# Altium PCB PCB.PcbDoc
Units mm, origin at the board's own origin, x right, y up, seen from the top; angles counter-clockwise.
Board outline 87.25 x 45.97 mm, 2 copper layers (Top Layer, Bottom Layer); 34 components, 25 nets, 122 pads, 2 vias.
Unrouted connection lines stored in the file: 1.
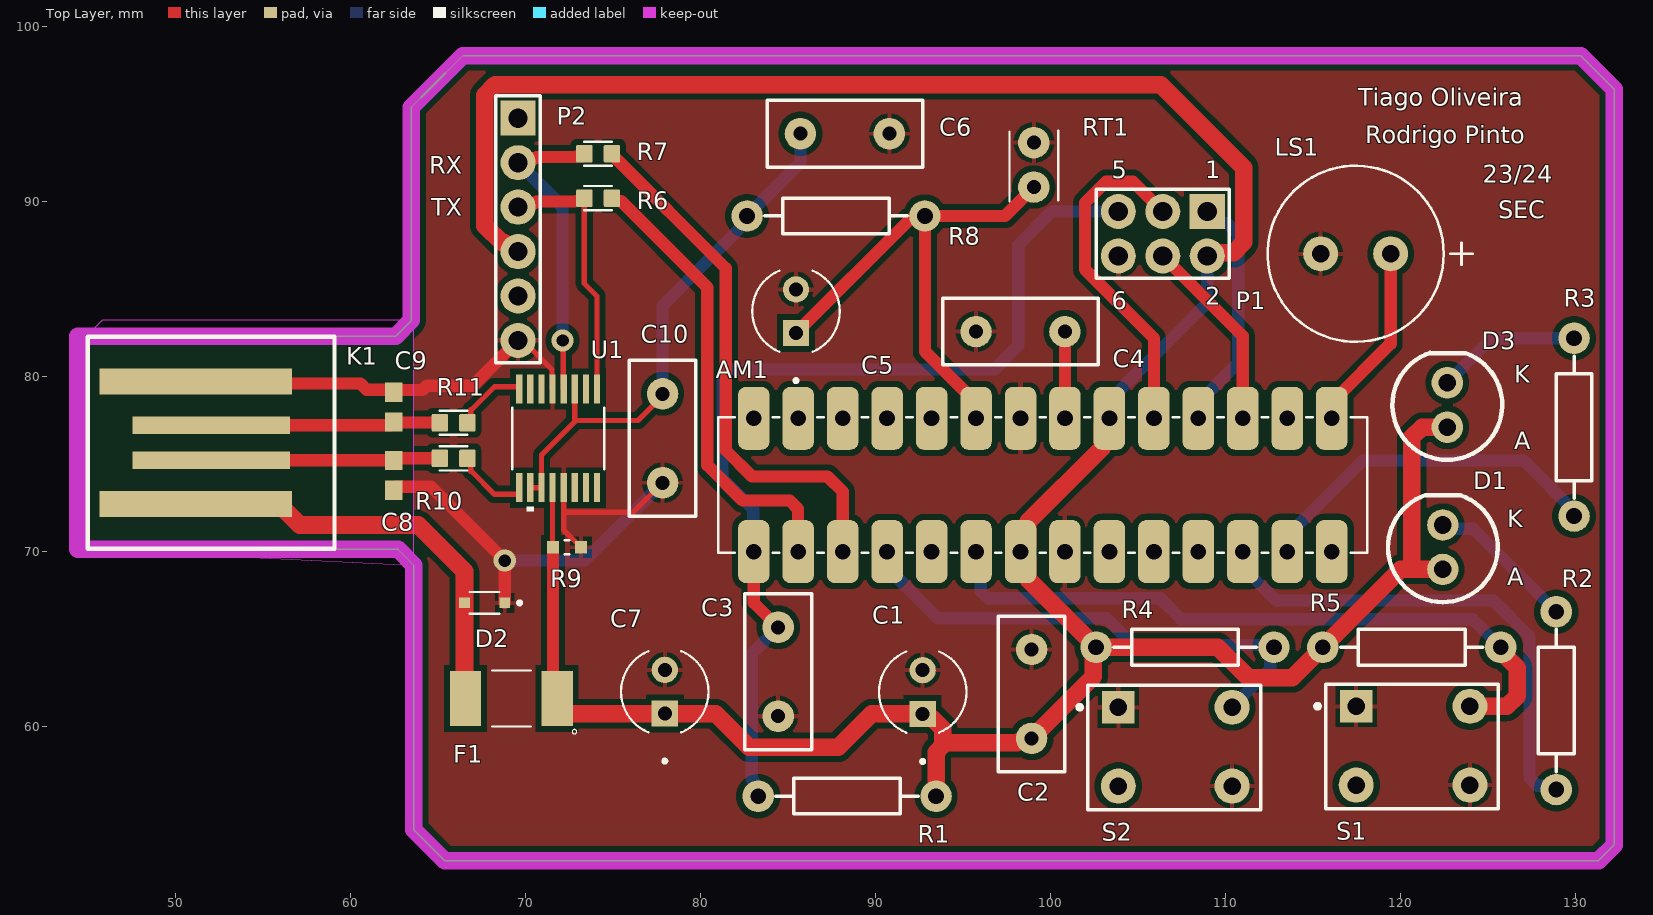
[diagram p0: Top Layer view]
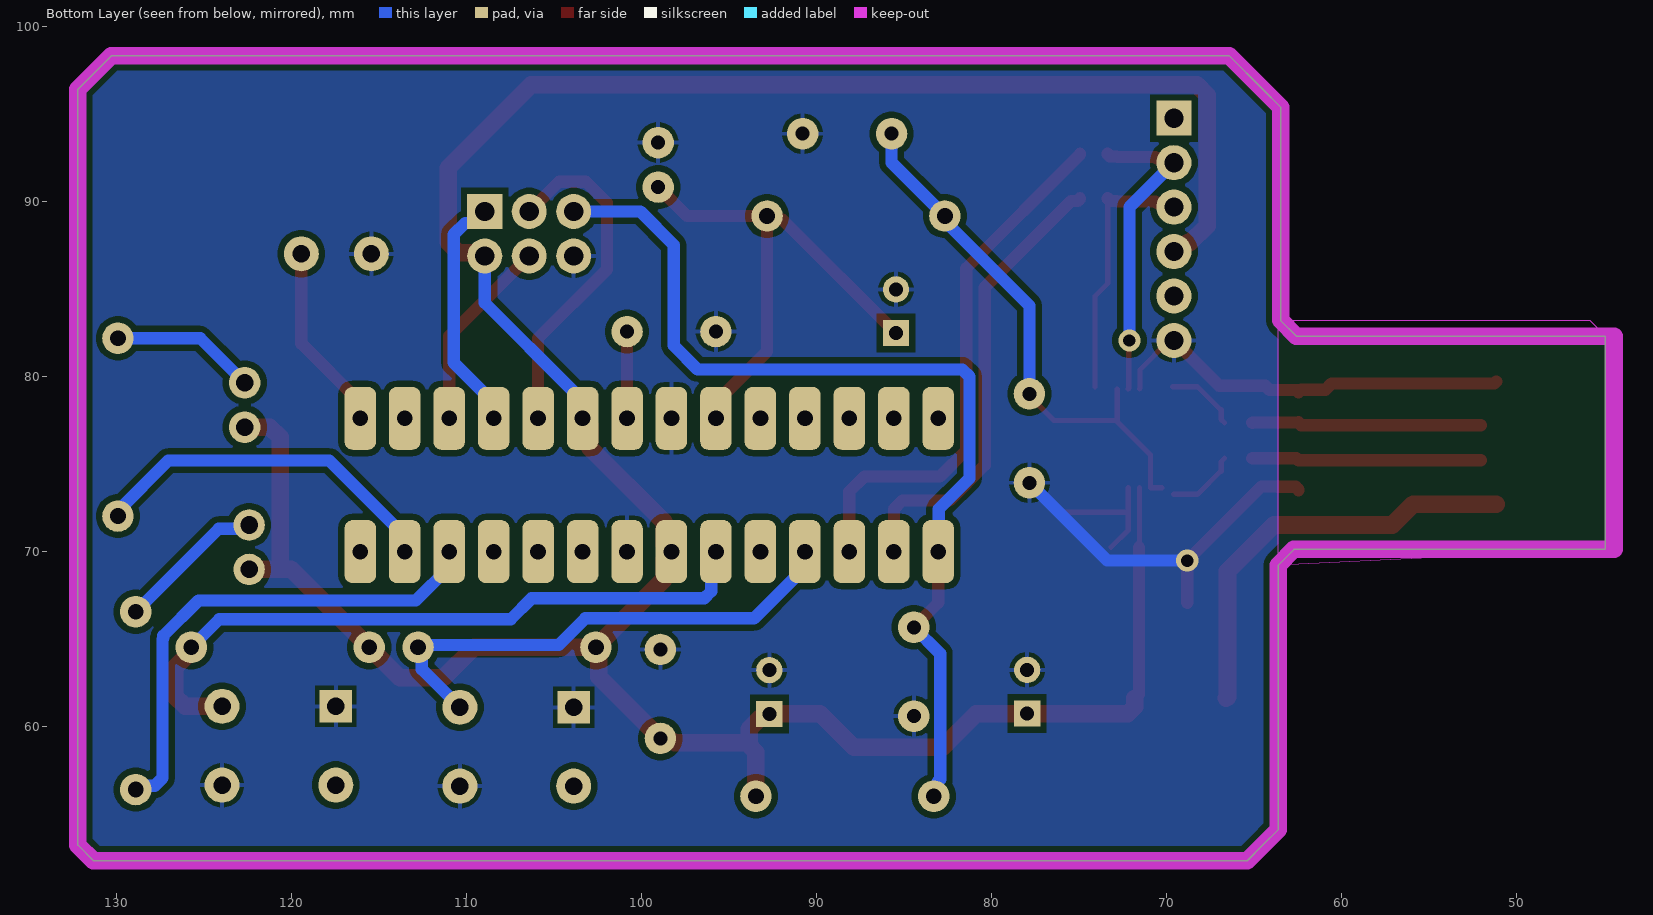
[diagram p1: Bottom Layer view, seen from below]
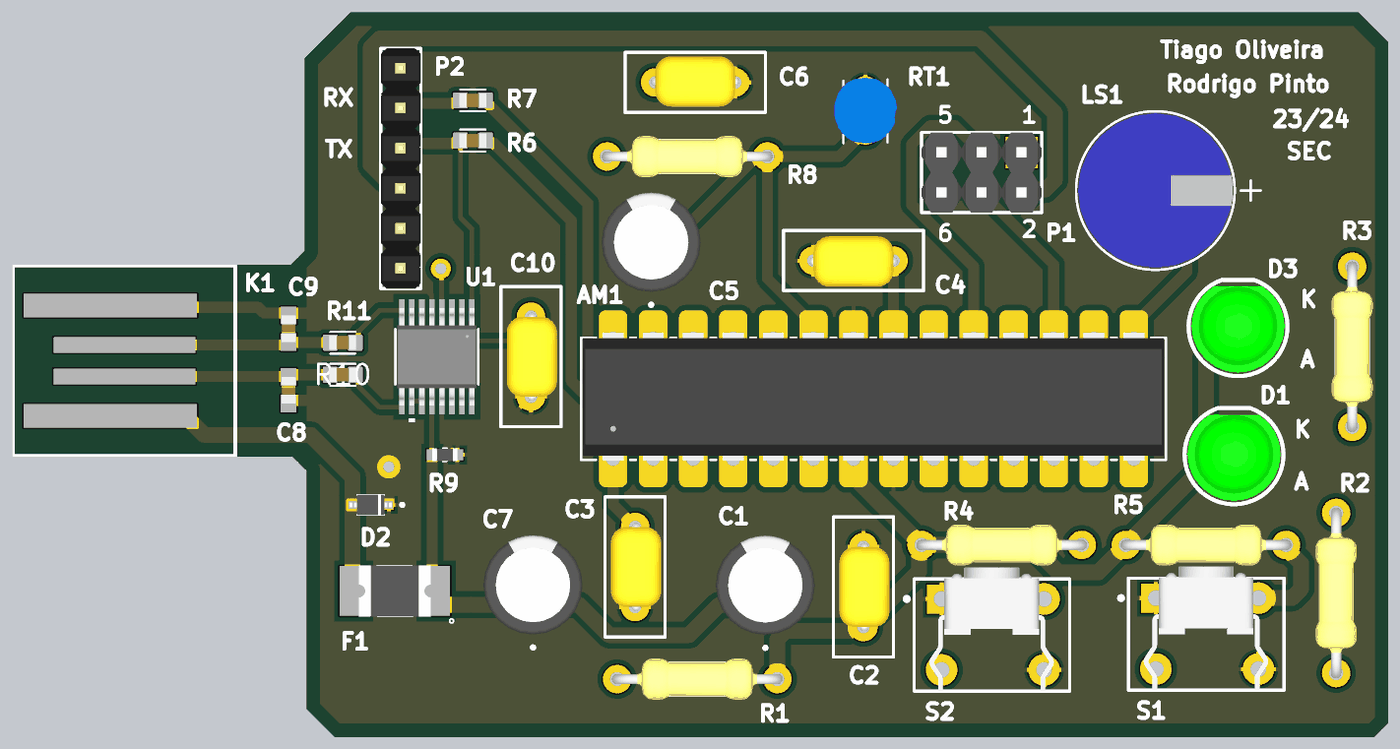
[diagram p2: 3D render of the assembled board from above, using the file's embedded part models]

## Layer stack, top to bottom
Top Solder: solder mask 0.0102, Solder Resist, Dk 3.5
Top Layer: signal copper 0.0356
Dielectric 1: dielectric 0.32, FR-4, Dk 4.8
Bottom Layer: signal copper 0.0356
Bottom Solder: solder mask 0.0102, Solder Resist, Dk 3.5

## Board outline
44.958,70.104 62.738,70.104 63.627,69.215 63.627,54.102 64.516,53.213 65.405,52.324 131.318,52.324 132.207,53.213 132.207,96.393 130.302,98.298 66.421,98.298 64.516,96.393 63.5,95.377 63.5,83.185 62.611,82.296 44.958,82.296

## Design rules (kind name [scope] priority, off if disabled: settings)
Clearance [All] p1: gap=0.254 ignorepadtopadclearanceinfootprint=TRUE
PolygonConnect [All] p1: thpad.connectstyle=Relief thpad.reliefconductorwidth=0.254 thpad.reliefentries=4 thpad.polygonreliefangle="90 Angle" thpad.airgapwidth=0.254 smdpad.connectstyle=Relief smdpad.reliefconductorwidth=0.254 smdpad.reliefentries=4 smdpad.polygonreliefangle="90 Angle" smdpad.airgapwidth=0.254 via.connectstyle=Direct via.reliefconductorwidth=0.254 via.reliefentries=4 via.polygonreliefangle="90 Angle" via.airgapwidth=0.254
RoutingVias [All] p1: holewidth=0.711 width=1.27 viastyle="Through Hole" minholewidth=0.711 minwidth=1.27 maxholewidth=0.711 maxwidth=1.27
SMDNeckDown [All] p1: percent=50.000
SilkToSolderMaskClearance [IsText] p1: minsilkscreentomaskgap=0.254 clearancetoexposedcopper=TRUE
SolderMaskExpansion [All] p1: expansion=0.102 istentingtop=FALSE
Width [All] p1: maxlimit=1 minlimit=0.254 preferedwidth=0.7 minimp=50.000000 maximp=50.000000 favimp=50.000000
29 further rules are at their usual default settings.

## Classes and differential pairs
component class U_USB: C8 C9 C10 R10 R11 U1
component class U_POWER: C7 D2 F1 R9
component class U_MicroControlador: AM1 C1 C2 C4 P1 R1
component class Main: C5 C6 D1 D3 K1 LS1 P2 R2 R3 R4 R5 R6 R7 R8 RT1 S1 S2

## Components (designator, comment, footprint, x,y, rotation, side; value= is the part's Value field where it differs from the comment)
AM1 "ATMega328P" ATMega328P 83.058,69.977 r90 top
C1 "CAP POL" "CONDENS 10uF" 92.71,61.956 r90 top value=10µF
C2 "CAP NON POL" "Capacitor 100nF" 98.933,61.849 r90 top value=100nF
C3 "CAP NON POL" "Capacitor 100nF" 84.455,63.119 r90 top value=100nF
C4 "CAP NON POL" "Capacitor 100nF" 98.298,82.55 r0 top value=100nF
C5 "CAP POL" "CONDENS 10uF" 85.471,83.713 r90 top value=10µF
C6 "CAP NON POL" "Capacitor 100nF" 88.265,93.853 r180 top value=100nF
C7 "CAP POL" "CONDENS 10uF" 77.978,61.976 r90 top value=10µF
C8 "CAP SMD" "CAP SMD" 62.484,74.334 r270 top value=47pF
C9 "CAP SMD" "CAP SMD" 62.484,78.232 r90 top value=47pF
C10 "CAP NON POL" "Capacitor 100nF" 77.851,76.454 r90 top value=100nF
D1 "LED RED" "LED 5mm" 122.428,70.231 r180 top
D2 "DIODO TVS" "DIODO TVS" 67.684,67.056 r180 top
D3 "LED YELLOW" "LED 5mm" 122.682,78.359 r180 top
F1 "FUSIVEL" "FUSIVEL ARMADO 0.5A" 69.215,61.595 r180 top
K1 "USB-A" USB 48.006,76.2 r90 top
LS1 "BUZ" BUZZ 119.443,86.995 r180 top
P1 "Header 3X2" "Connector Header 3x2" 108.966,89.408 r180 top
P2 "POLOLU AVR PROG" "Connector Header 1x6" 69.596,94.742 r270 top
R1 "RES THT" RESISTENCIA 88.392,56.007 r0 top value=10K
R2 "RES THT" RESISTENCIA 128.905,61.468 r90 top value=150R
R3 "RES THT" RESISTENCIA 129.921,77.089 r90 top value=150R
R4 "RES THT" RESISTENCIA 107.696,64.516 r0 top value=10K
R5 "RES THT" RESISTENCIA 120.65,64.516 r0 top value=10K
R6 "RES SMD" "RES SMDD" 74.168,90.17 r0 top value=120R
R7 "RES SMD" "RES SMDD" 74.168,92.71 r0 top value=120R
R8 "RES THT" RESISTENCIA 87.757,89.154 r180 top value=5K76
R9 "VARISTOR" VARISTOR 72.39,70.231 r0 top
R10 "RES SMD" "RES SMDD" 65.913,75.311 r0 top value=27R
R11 "RES SMD" "RES SMDD" 65.913,77.343 r0 top value=27R
RT1 "NTC" NTC 99.06,92.075 r90 top
S1 "SWITCH" "Switch Tactile" 117.475,61.142 r0 top
S2 "SWITCH" "Switch Tactile" 103.886,61.087 r0 top
U1 "USB CONVERTER" "CONVERSOR USB PARA UART" 71.882,76.454 r270 top

## Footprints (in the part's own frame and the unit in brackets; to place one, negate y for a bottom-side part, rotate by r counter-clockwise, add the part's x,y. Pads: shape width x height; smd on the part's side, far side on the other; paste and mask are expansions set on the pad)
ATMega328P [mm]
  rrect50% 3.6x1.8 hole 0.9 paste-0.762 mask+0: 1(0,0) 2(0,-2.54) 3(0,-5.08) 4(0,-7.62) 5(0,-10.16) 6(0,-12.7) 7(0,-15.24) 8(0,-17.78) 9(0,-20.32) 10(0,-22.86) 11(0,-25.4) 12(0,-27.94) 13(0,-30.48) 14(0,-33.02) 15(7.62,-33.02) 16(7.62,-30.48) 17(7.62,-27.94) 18(7.62,-25.4) 19(7.62,-22.86) 20(7.62,-20.32) 21(7.62,-17.78) 22(7.62,-15.24) 23(7.62,-12.7) 24(7.62,-10.16) 25(7.62,-7.62) 26(7.62,-5.08) 27(7.62,-2.54) 28(7.62,0)
  silkscreen extent -0.06,-35.05 7.68,2.03, body extent -0.13,-34.92 7.99,1.91, height 5.21
BUZZ [mm] "Magnetic Transducer Buzzer"
  round 2 hole 1 paste-0.711 mask+0: N(4,0) P(0,0)
  silkscreen extent -4.68,-5.03 7.03,5.03, body extent -2.91,-4.9 6.9,4.9, height 5.02
"CAP SMD" [mm] "Chip Capacitor, Body 1.6x0.8mm, IPC High Density"
  rect 1.1x1 smd: 1(-0.85,0) 2(0.85,0)
  body extent -0.85,-0.44 0.85,0.44, height 0.86
"Capacitor 100nF" [mm] "Radial Cap, Thru-Hole; 2 Leads; 0.2 in Pin Spacing"
  round 1.8 hole 0.8: 1(-2.54,0) 2(2.54,0)
  silkscreen extent -4.44,-1.91 4.44,1.91, body extent -2.79,-1.65 2.79,1.53, height 6.81
"CONDENS 10uF" [mm] "Polarized Capacitor; 2 Leads"
  rect 1.5x1.5 hole 0.8: 1(-1.25,0)
  round 1.5 hole 0.8: 2(1.25,0)
  silkscreen extent -4.06,-2.5 2.32,2.5, body extent -3.15,-3.15 3.15,3.15, height 11.2
"Connector Header 1x6" [mm] "Connector; Header; 6 Position"
  rect 2x2 hole 1.1: 1(0,0)
  round 2 hole 1.1: 2(2.54,0) 3(5.08,0) 4(7.62,0) 5(10.16,0) 6(12.7,0)
  silkscreen extent -1.27,-1.27 13.97,1.27, body extent -1.27,-1.27 13.97,1.27, height 9.2
"Connector Header 3x2" [mm] "Connector; Header; 3x2 Position"
  rect 2x2 hole 1.1: 1(0,0)
  round 2 hole 1.1: 2(0,2.54) 3(2.54,0) 4(2.54,2.54) 5(5.08,0) 6(5.08,2.54)
  silkscreen extent -1.27,-1.27 6.35,3.81, body extent -1.27,-1.27 6.35,3.81, height 8.38
"CONVERSOR USB PARA UART" [mil]
  rect 65.15x13.97 smd paste+0 mask+0: 1(-111.08,87.5) 2(-111.08,62.5) 3(-111.08,37.5) 4(-111.08,12.5) 5(-111.08,-12.5) 6(-111.08,-37.5) 7(-111.08,-62.5) 8(-111.08,-87.5) 9(111.08,-87.5) 10(111.08,-62.5) 11(111.08,-37.5) 12(111.08,-12.5) 13(111.08,12.5) 14(111.08,37.5) 15(111.08,62.5) 16(111.08,87.5)
  silkscreen extent -69,-104 164,104, body extent -122,-99 122,99, height 69
"DIODO TVS" [mm] "Diode, Axial; Body 5.2 x 2.7 mm (LxDia. max), Lead Dia. 0.86 mm (max)"
  rect 0.6x0.6 smd paste-0.05: 1(-1.15,0) 2(1.15,0)
  silkscreen extent -2.1,-0.62 0.85,0.62, body extent -1.34,-0.65 1.34,0.65, height 1.15
"FUSIVEL ARMADO 0.5A" [mm] "Thru-Hole; 2 Leads"
  rect 1.78x3.15 smd: 1(-2.615,0) 2(2.615,0)
  silkscreen extent -3.73,-1.6 1.1,2.03, body extent -2.27,-1.62 2.27,1.62, height 1.25
"LED 5mm" [mm] "LED; 2 Leads"
  round 1.8 hole 1: 1(0,1.27) 2(0,-1.27)
  silkscreen extent -3.14,-2.98 3.14,3.14, body extent -2.95,-2.54 2.95,2.91, height 9.6
NTC [mm] "Chip Resistor, Body 2.0x1.2mm, IPC Medium Density"
  round 1.8 hole 0.8: 1(-1.27,0) 2(1.27,0)
  silkscreen extent -2.09,-1.4 1.97,1.4, body extent -2.1,-2 2.08,2, height 9
"RES SMDD" [mm] "Axial Device, Thru-Hole; 2 Leads; 0.3 in Pin Spacing"
  rrect20% 0.94x1.02 smd: 1(-0.79,0) 2(0.79,0)
  silkscreen extent -0.8,-0.69 0.8,0.69, body extent -0.85,-0.44 0.85,0.44, height 0.61
RESISTENCIA [mm] "Axial Device, Thru-Hole; 2 Leads; 0.4 in Pin Spacing"
  round 1.8 hole 0.9: 1(-5.08,0) 2(5.08,0)
  silkscreen extent -4.06,-1.02 4.06,1.02, body extent -5.41,-1.3 5.41,1.3, height 8.8
"Switch Tactile" [mm] "Switch; 4 Leads"
  rect 1.85x1.85 hole 1: 1(0,0)
  round 2 hole 1: 2(0,-4.5) 3(6.5,-4.5) 4(6.5,0)
  silkscreen extent -2.34,-5.84 8.13,1.27, body extent -0.77,-5.29 7.12,0.71, height 4.3
USB [mm]
  rrect4% 1.5x11 smd: 01(-3.5,-3.175) 04(3.5,-3.175)
  rrect4% 1x9 smd: 02(-1,-4.064) 03(1,-4.064)
  silkscreen extent -6.05,-11.1 6.05,3
VARISTOR [mm] "Chip Resistor, Body 2.0x1.2mm, IPC High Density"
  rect 0.7x0.7 smd: 1(-0.8,0) 2(0.8,0)
  silkscreen extent -0.13,-0.4 0.13,0.4, body extent -0.8,-0.4 0.8,0.4, height 0.9

## Part data
C1 C5 C7: library part "Cap Pol2", "Polarized Capacitor (Axial)", LatestRevisionDate=17-Jul-2002, LatestRevisionNote="Re-released for DXP Platform.", PackageDescription="Polarized Capacitor; 2 Leads", PackageReference=POLAR0.8, Published=8-Jun-2000, Publisher="Altium Limited"
C2 C3 C4 C6 C10: library part Cap, "Capacitor", LatestRevisionDate=17-Jul-2002, LatestRevisionNote="Re-released for DXP Platform.", PackageDescription="Radial Cap, Thru-Hole; 2 Leads; 0.3 in Pin Spacing", PackageReference=RAD-0.3, Published=8-Jun-2000, Publisher="Altium Limited"
C8 C9: library part "CONDENSADOR SMD", "Capacitor (Semiconductor SIM Model)", LatestRevisionDate=29-May-2009, LatestRevisionNote="IPC-7351 Footprint Added.", PackageDescription="Chip Capacitor", PackageReference=C1206, Published=8-Jun-2000, Publisher="Altium Limited"
D1 D3: library part LED1, "Typical RED GaAs LED", LatestRevisionDate=08-Jul-2005, LatestRevisionNote="Mech Layer 1 removed.", PackageDescription="LED; 2 Leads", PackageReference=LED-1, Published=8-Jun-2000, Publisher="Altium Limited"
D2: "1 Amp General Purpose Rectifier", Code_JEDEC=DO-204-AL, ComponentLink1Description="Manufacturer Link", ComponentLink1URL=http://www.fairchildsemi.com/, ComponentLink2Description=Datasheet, ComponentLink2URL=http://www.fairchildsemi.com/ds/1N%2F1N4001.pdf, DatasheetVersion=1998, LatestRevisionDate=17-Jul-2002, LatestRevisionNote="Re-released for DXP Platform.", PackageDescription="Diode, Axial; Body 5.2 x 2.7 mm (LxDia. max), Lead Dia. 0.86 mm (max)", PackageReference=DO-41, PackageVersion=Aug-1999, Published=8-Jun-2000, Publisher="Altium Limited"
F1: library part "FUSIVEL ARMADO 0.5A", "Fuse", LatestRevisionDate=17-Jul-2002, LatestRevisionNote="Re-released for DXP Platform.", PackageDescription="Thru-Hole; 2 Leads", PackageReference=PIN-W2/E2.8, Published=8-Jun-2000, Publisher="Altium Limited"
LS1: "Magnetic Transducer Buzzer", ComponentLink1Description="Manufacturer Link", ComponentLink1URL=http://www.megastar.com/linecard/buzzmode/index.php, DatasheetVersion=17-Dec-2003, LatestRevisionDate=17-Dec-2003, LatestRevisionNote="Schematic revised, PCB Footprint replaced.", PackageDescription="Magnetic Transducer Buzzer", PackageReference=ABSM-1574, Published=24-Mar-1999, Publisher="Altium Limited"
P1: "Header, 3-Pin, Dual row", LatestRevisionDate=17-Jul-2002, LatestRevisionNote="Re-released for DXP Platform.", Publisher="Altium Limited"
P2: library part "Header 6", "Header, 6-Pin", LatestRevisionDate=17-Jul-2002, LatestRevisionNote="Re-released for DXP Platform.", Publisher="Altium Limited"
R1 R2 R3 R4 R5 R8: library part Res1, "Resistor", LatestRevisionDate=17-Jul-2002, LatestRevisionNote="Re-released for DXP Platform.", PackageDescription="Axial Device, Thru-Hole; 2 Leads; 0.3 in Pin Spacing", PackageReference=AXIAL-0.3, Published=8-Jun-2000, Publisher="Altium Limited"
R6 R7 R10 R11: "Resistor", LatestRevisionDate=17-Jul-2002, LatestRevisionNote="Re-released for DXP Platform.", PackageDescription="Axial Device, Thru-Hole; 2 Leads; 0.4 in Pin Spacing", PackageReference=AXIAL-0.4, Published=8-Jun-2000, Publisher="Altium Limited"
R9: "Varistor (Voltage-Sensitive Resistor)", Code_IPC=RESC2012, LatestRevisionDate=29-May-2009, LatestRevisionNote="IPC-7351 Footprint Added.", PackageDescription="Chip Resistor 0805 Case Size", PackageReference=6-0805, PackageVersion=Mar-2003, Published=24-Mar-1999, Publisher="Altium Limited"
RT1: "Thermistor", Code_IPC=RESC2012, LatestRevisionDate=29-May-2009, LatestRevisionNote="IPC-7351 Footprint Added.", PackageDescription="Chip Resistor 0805 Case Size", PackageReference=6-0805, PackageVersion=Mar-2003, Published=24-Mar-1999, Publisher="Altium Limited"
S1 S2: library part SW-DPST, "Double-Pole, Single-Throw Switch", LatestRevisionDate=17-Jul-2002, LatestRevisionNote="Re-released for DXP Platform.", PackageDescription="Switch; 4 Leads", PackageReference=DPST-4, Published=24-Mar-1999, Publisher="Altium Limited"
U1: library part FT230XS-R, "No Description Available", Mfr_Name="FTDI, Future Technology Devices International Ltd", Copyright="Copyright (C) 2023 Ultra Librarian. All rights reserved.", Manufacturer_Part_Number=FT230XS-R, RefDes=RefDes, Type=DEV

## Via types
v1: diameter 1.27, hole 0.711, Top Layer to Bottom Layer, 2 vias

## Nets (pads, with @x,y where several pads share a name; then routed paths per layer and width w, separated by ;. In a path a pad name is that pad's centre, name@x,y a point inside that pad or via, vN(x,y) a via of type N, cw(c..) or ccw(c..) an arc to the next point about the centre after c; other vN are vias at no path point)
3V3: C6.2 C10.2 R8.2 U1.3 U1.10 U1.11 | length 30.9
  Top Layer w0.3: U1.10 U1.11 70.929,75.501 72.898,77.47 ; U1.3 72.834,77.534 72.898,77.47 ; C10.2 77.851,78.877 76.444,77.47 72.898,77.47
  Bottom Layer w0.7: C10.2 77.851,84.03 82.677,88.856 R8.2 85.725,92.202 C6.2
D+: C9.1 K1.03 R11.1 | length 12.9
  Top Layer w0.7: K1.03 C9.1@62.334,77.2 ; C9.1 62.504,77.363 65.104,77.363 R11.1
D-: C8.1 K1.02 R10.1 | length 13.1
  Top Layer w0.7: K1.02 62.468,75.2 C8.1 62.611,75.311 R10.1
MISO: AM1.18 P1.1 | length 13.8
  Bottom Layer w0.7: AM1.18 108.458,78.497 110.744,80.783 110.744,88.094 110.08,88.758 109.616,88.758 P1.1
MOSI: AM1.17 P1.4 | length 11.2
  Top Layer w0.7: P1.4 110.998,82.296 AM1.17
NetAM1_2: AM1.2 R6.2 | length 26.4
  Top Layer w0.7: R6.2 74.958,90.13 75.078,90.01 75.471,90.01 80.408,85.073 80.408,74.913 82.423,72.898 85.112,72.898 85.593,72.417 85.593,69.982 AM1.2
NetAM1_3: AM1.3 R7.2 | length 30.7
  Top Layer w0.7: R7.2 74.958,92.67 81.458,86.17 81.458,75.771 82.955,74.274 87.27,74.274 88.138,73.406 AM1.3
NetAM1_4: AM1.4 R4.2 S2.4 | length 29.3
  Bottom Layer w0.7: AM1.4 90.678,69.077 93.588,66.167 103.228,66.167 104.216,65.179 104.216,65.17 104.743,64.643 112.649,64.643 R4.2 112.566,64.306 112.566,63.267 S2.4
NetAM1_6: AM1.6 R5.2 S1.4 | length 39.5
  Top Layer w1: S1.4 126.088,61.142 126.674,61.728 126.674,63.356 125.73,64.3 R5.2
  Bottom Layer w0.7: AM1.6 96.022,69.713 96.022,67.72 96.432,67.31 106.289,67.31 107.483,66.116 124.13,66.116 R5.2
NetAM1_12: AM1.12 R2.1 | length 28.8
  Bottom Layer w0.7: AM1.12 110.998,69.09 112.905,67.183 125.326,67.183 127.33,65.179 127.33,65.043 127.381,64.992 127.381,57.042 127.824,56.598 128.695,56.598 R2.1
NetAM1_13: AM1.13 R3.1 | length 20.6
  Bottom Layer w0.7: AM1.13 113.538,70.877 117.845,75.184 127.044,75.184 129.921,72.307 R3.1
NetAM1_15: AM1.15 LS1.P | length 10.8
  Top Layer w0.7: AM1.15 116.078,78.497 119.443,81.862 LS1.P
NetAM1_21: AM1.21 C4.2 | length 5
  Top Layer w0.7: AM1.21 C4.2
NetAM1_23: AM1.23 C5.1 R8.1 RT1.1 | length 29.8
  Top Layer w0.7: C5.1 91.951,88.944 92.627,88.944 R8.1 ; AM1.23 95.758,78.497 92.837,81.418 R8.1 ; RT1.1 97.409,89.154 R8.1
NetD1_2: D1.2 R2.2 | length 8.5
  Bottom Layer w0.7: D1.2 122.638,71.291 124.162,71.291 R2.2
NetD3_2: D3.2 R3.2 | length 8.7
  Top Layer w1: D3.2 D3.2@122.944,79.891
  Bottom Layer w0.7: D3.2 125.222,82.169 R3.2
NetR10_2: R10.2 U1.9 | length 4.1
  Top Layer w0.3: R10.2 66.896,75.118 66.896,74.57 66.936,74.57 68.254,73.252 U1.9@69.617,73.252
NetR11_2: R11.2 U1.8 | length 4.1
  Top Layer w0.3: R11.2 66.896,77.536 66.896,78.084 66.936,78.084 68.254,79.402 U1.8@69.659,79.402
RESET: AM1.1 C3.2 P1.5 R1.1 | length 55.9
  Top Layer w0.7: AM1.1 83.058,67.056 C3.2
  Bottom Layer w0.7: AM1.1 83.031,70.004 83.031,72.417 81.28,74.168 81.28,79.981 81.69,80.391 96.806,80.391 98.171,81.756 98.171,87.503 100.076,89.408 P1.5 ; R1.1 83.102,56.217 83.102,56.817 82.951,56.967 82.951,64.155 C3.2
RX: P2.2 R7.1 U1.4 | length 18
  Top Layer w0.3: v1(72.136,82.042) 72.172,82.006 72.172,79.303 U1.4
  Top Layer w0.7: P2.2 69.845,92.451 70.58,92.451 70.656,92.527 72.848,92.527 72.871,92.55 73.258,92.55 73.378,92.67 R7.1
  Bottom Layer w0.7: P2.2 72.136,89.662 v1(72.136,82.042)
SCK: AM1.19 P1.3 | length 19.6
  Top Layer w0.7: AM1.19 105.918,82.169 101.981,86.106 101.981,89.907 103.182,91.108 104.726,91.108 P1.3
TX: P2.3 R6.1 U1.1 | length 15.1
  Top Layer w0.3: R6.1 73.378,85.294 74.105,84.568 U1.1@74.105,79.402
  Top Layer w0.7: P2.3 69.845,89.911 70.58,89.911 70.656,89.987 72.848,89.987 72.871,90.01 73.258,90.01 73.378,90.13 R6.1
"USB GND": AM1.8 AM1.22 C1.2 C2.2 C3.1 C4.1 C5.2 C6.1 C7.2 C8.2 C9.2 C10.1 D2.1 K1.04 LS1.N P1.6 P2.6 R9.2 RT1.2 S1.1 S1.3 S2.1 S2.3 U1.5 U1.13 | length 55.3
  Top Layer w0.3: P2.6 69.866,82.042 71.537,80.371 71.537,79.303 U1.5 ; U1.13 72.2,72.225 72.2,71.221 R9.2 ; 72.214,72.225 76.162,72.225 C10.1
  Top Layer w0.7: K1.04 51.3,79.582 60.584,79.582 60.934,79.231 62.334,79.231 C9.2 62.611,79.209 64.13,79.209 64.384,79.463 67.017,79.463 P2.6 ; C8.2 62.484,73.534 62.634,73.684 63.669,73.684 63.684,73.699 64.604,73.699 v1(68.834,69.469) D2.1
  Bottom Layer w0.7: v1(68.834,69.469) 73.406,69.469 C10.1
"USB VCC": D2.2 F1.2 K1.01 | length 24.2
  Top Layer w1: K1.01 55.931,72.7 57.13,71.501 63.881,71.501 66.534,68.848 D2.2 66.534,61.661 F1.2
VCC: AM1.7 AM1.20 C1.1 C2.1 C7.1 D1.1 D3.1 F1.1 P1.2 P2.4 R1.2 R4.1 R5.1 R9.1 U1.12 | length 176.5
  Top Layer w0.3: U1.12 71.564,70.257 R9.1 ; F1.1@71.59,61.835 F1.1
  Top Layer w0.7: F1.1@71.59,61.835 R9.1
  Top Layer w1: P2.4 69.325,87.122 68.825,87.622 68.677,87.622 67.691,88.608 67.691,96.061 68.277,96.647 106.317,96.647 111.064,91.901 111.064,87.645 110.478,87.059 109.157,87.059 P1.2 ; F1.1 71.83,61.116 72.22,60.726 C7.1 80.879,60.726 82.807,58.798 87.881,58.798 89.789,60.706 C1.1 92.96,60.456 93.267,60.456 93.853,59.87 93.853,59.055 ; R1.2 93.472,58.526 93.853,58.907 93.853,59.055 ; AM1.20 102.978,77.197 102.978,75.927 98.698,71.647 98.698,70.377 AM1.7 98.698,69.577 98.698,68.434 R4.1 ; D1.1@122.428,69.026 D1.1 120.523,68.961 ; D3.1 121.236,77.089 120.65,76.503 120.65,69.088 120.523,68.961 ; 93.853,59.055 98.113,59.055 98.214,59.156 98.78,59.156 102.463,62.839 102.463,64.363 R4.1 ; R4.1 109.573,64.516 111.323,62.766 113.82,62.766 R5.1 120.015,68.961 120.523,68.961
  Bottom Layer w0.7: AM1.20 103.378,78.551 103.928,79.101 103.928,79.163 108.966,84.201 P1.2
pads on no net: AM1.5 AM1.9 AM1.10 AM1.11 AM1.14 AM1.16 AM1.24 AM1.25 AM1.26 AM1.27 AM1.28 P2.1 P2.5 S1.2 S2.2 U1.2 U1.6 U1.7 U1.14 U1.15 U1.16

## Polygon pours and split planes (outlines as drawn)
"USB GND" on Top Layer "USB_GND_L01_P002" (solid, remove dead copper, pour order 2): 44.958,70.104 62.738,70.104 63.627,69.215 63.627,54.102 64.516,53.213 65.405,52.324 131.318,52.324 132.207,53.213 132.207,96.393 130.302,98.298 66.421,98.298 64.516,96.393 63.5,95.377 63.5,83.185 62.611,82.296 44.958,82.296
"USB GND" on Bottom Layer "USB_GND_L02_P003" (solid, remove dead copper, pour order 3): 44.958,70.104 62.738,70.104 63.627,69.215 63.627,54.102 64.516,53.213 65.405,52.324 131.318,52.324 132.207,53.213 132.207,96.393 130.302,98.298 66.421,98.298 64.516,96.393 63.5,95.377 63.5,83.185 62.611,82.296 44.958,82.296

## Keep-outs
Keep-Out Layer:
  region: 63.627,69.215 63.627,83.058 63.5,83.185 45.847,83.185 44.958,82.296 44.958,70.104
  lines w1: 44.45,70.104 44.45,82.296 59.055,82.296 61.468,82.296 62.611,82.296 63.5,83.185 63.5,95.377 64.516,96.393 66.421,98.298 130.302,98.298 132.207,96.393 132.207,53.213 131.318,52.324 65.405,52.324 64.516,53.213 63.627,54.102 63.627,54.356 63.627,69.215 62.738,70.104 61.595,70.104 59.182,70.104 44.45,70.104

## Silkscreen, mask and mechanical layers (free items; w line width, h text height)
Top Overlay:
  text "Tiago Oliveira" at 117.602,95.456 h1
  text "Rodrigo Pinto" at 117.983,93.297 h1
  text "RX" at 64.516,91.567 h1
  text "23/24" at 124.714,91.059 h1
  text "TX" at 64.643,89.154 h1
  text "SEC" at 125.603,89.027 h1

## Text inside footprints (layer, text, board x,y; h text height)
AM1: Mechanical 13 "*" at 83.693,69.977 h1.27 r90
D1: Top Overlay "A" at 126.111,68.072 h1; Top Overlay "K" at 126.111,71.374 h1
D3: Top Overlay "A" at 126.492,75.819 h1; Top Overlay "K" at 126.492,79.629 h1
P1: Top Overlay "2" at 108.839,84.074 h1; Top Overlay "6" at 103.505,83.82 h1; Top Overlay "5" at 103.505,91.313 h1; Top Overlay "1" at 108.839,91.313 h1
U1: Mechanical 13 "*" at 73.038,78.384 h1.27 r270